# Altium PCB inwall_wifi_psu.PcbDoc
Units mm, origin at the board's own origin, x right, y up, seen from the top; angles counter-clockwise.
Board outline 50 x 50 mm, 2 copper layers (Top Layer, Bottom Layer); 16 components, 15 nets, 48 pads, 0 vias.
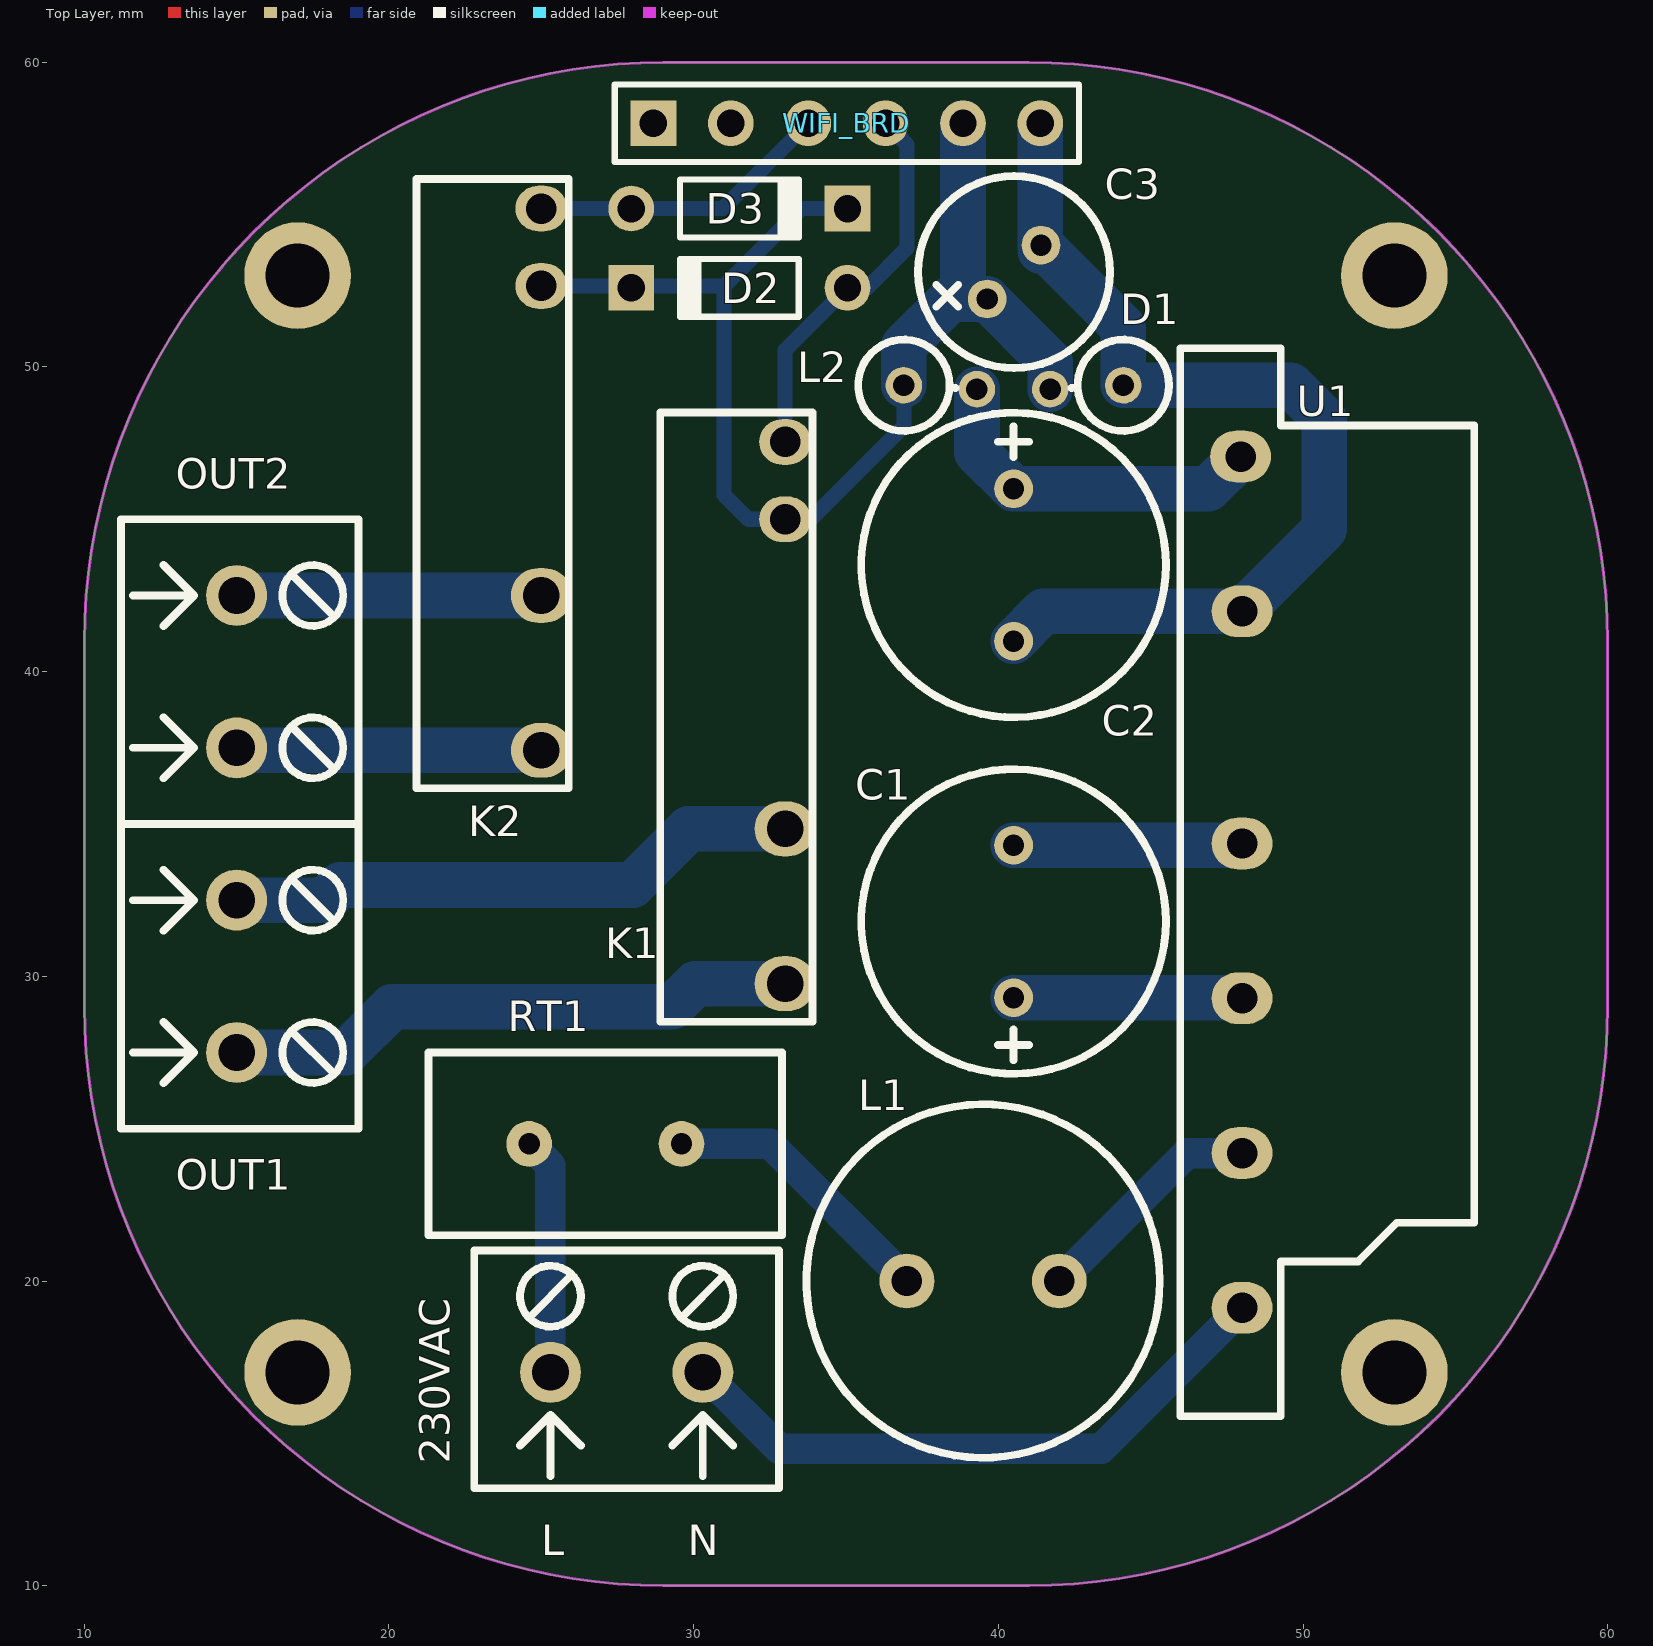
[diagram p0: Top Layer view]
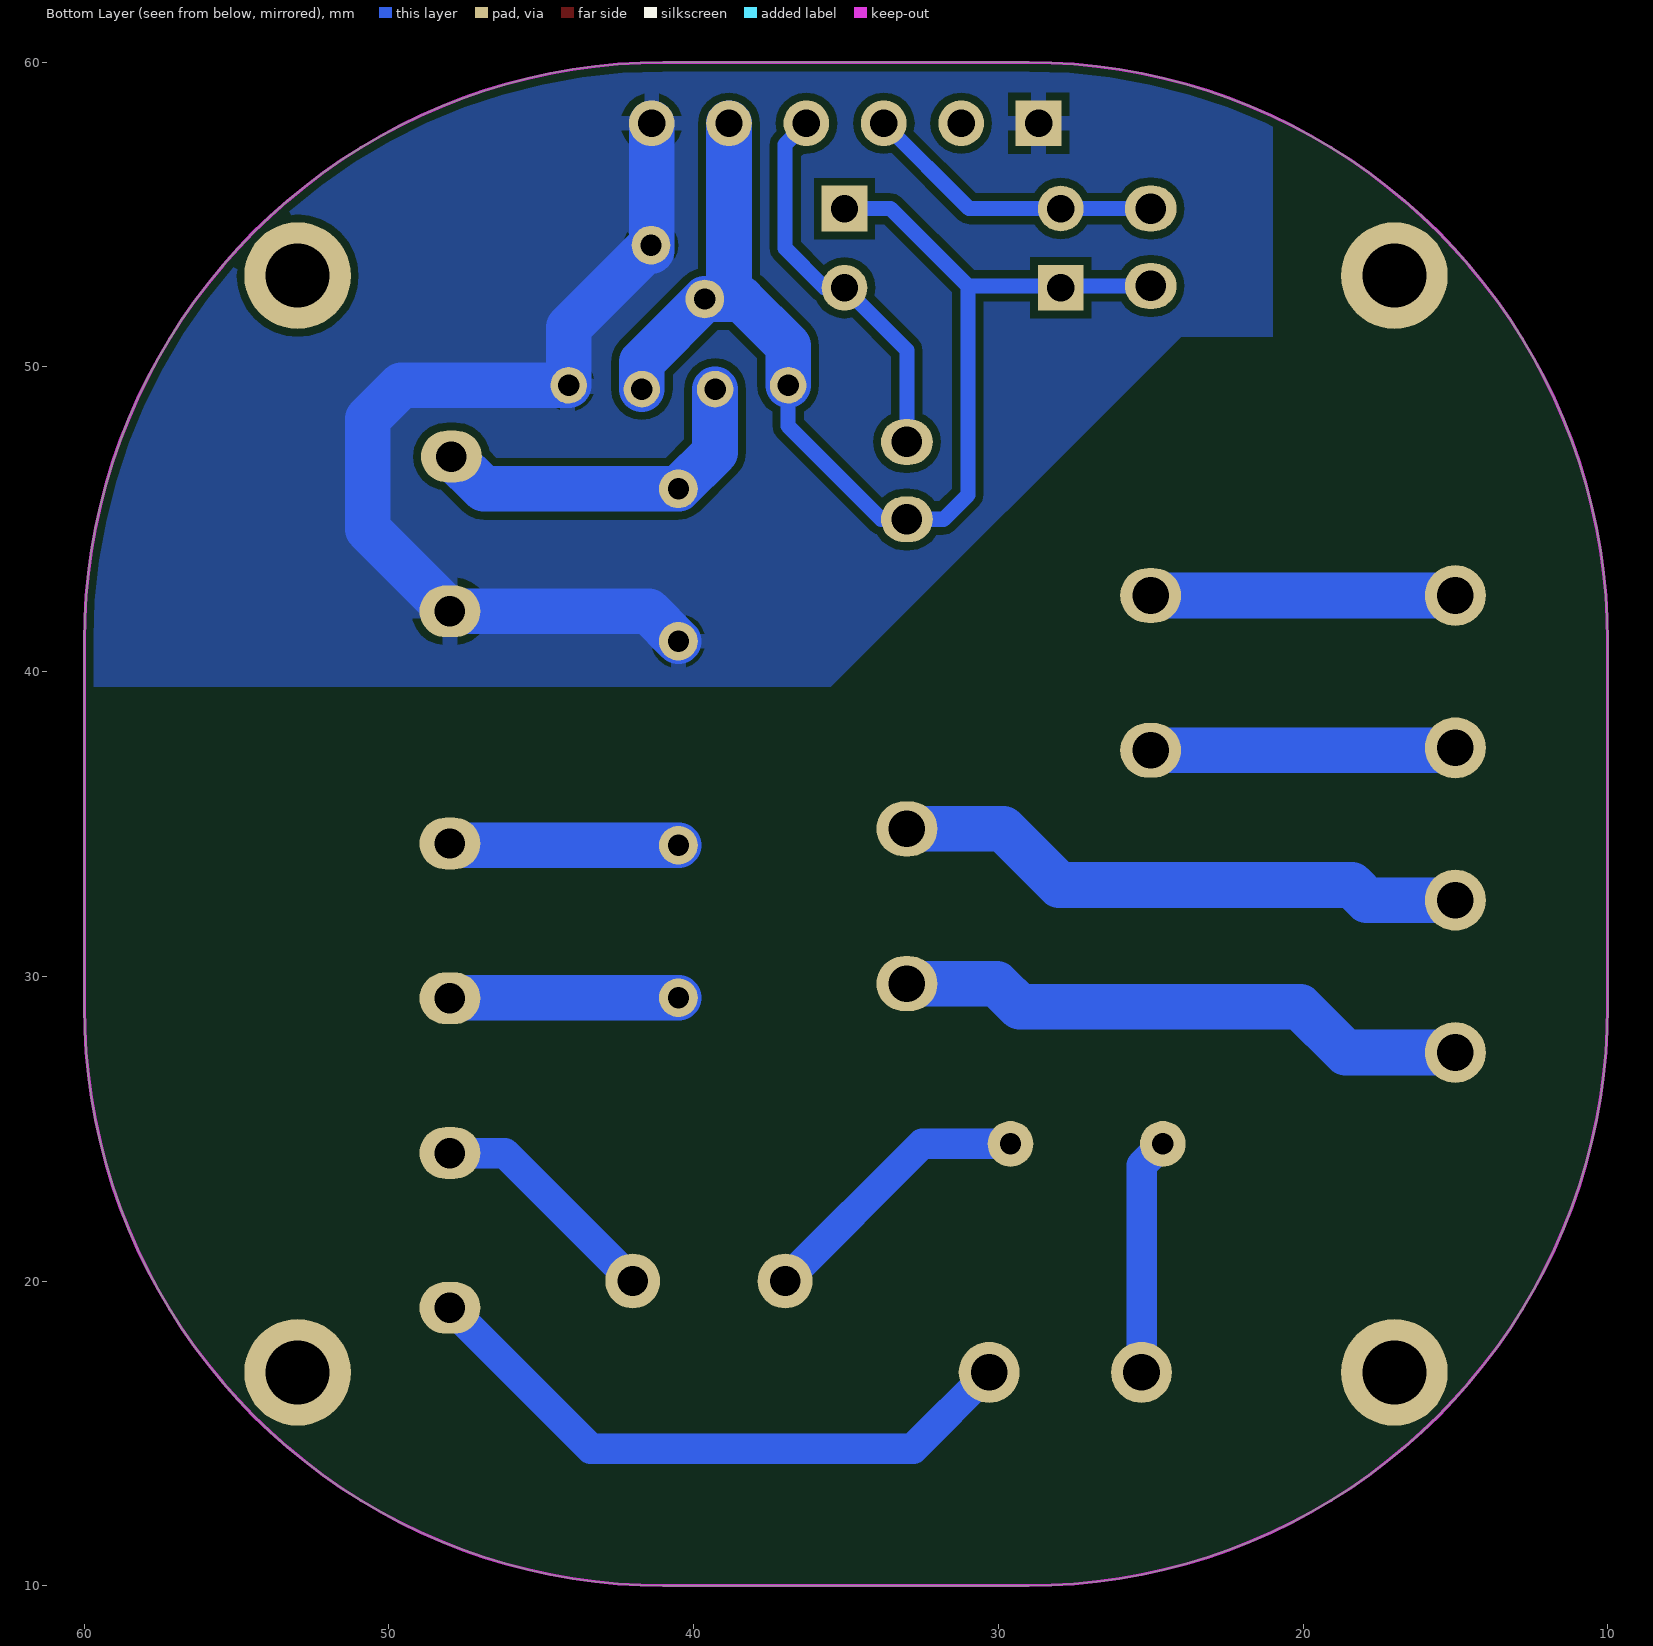
[diagram p1: Bottom Layer view, seen from below]

## Layer stack, top to bottom
Top Solder: solder mask 0.0102, Solder Resist, Dk 3.5
Top Layer: signal copper 0.0356
Dielectric 1: dielectric 0.32, FR-4, Dk 4.8
Bottom Layer: signal copper 0.0356
Bottom Solder: solder mask 0.0102, Solder Resist, Dk 3.5

## Board outline
29,10 cw(c29,29) 10,29 10,41 cw(c29,41) 29,60 41,60 cw(c41,41) 60,41 60,29 cw(c41,29) 41,10

## Design rules (kind name [scope] priority, off if disabled: settings)
Clearance [All] p1: gap=0.25 ignorepadtopadclearanceinfootprint=FALSE except(0: Arc-Hole Track-Hole SMDPad-Hole THPad-Hole Via-Hole Fill-Hole Poly-Hole Region-Hole Text-Hole)
ComponentClearance [All] p1: gap=0.1 collisioncheckmode=3 verticalgap=0.254 showdistances=FALSE
DiffPairsRouting [All] p1: maxlimit=0.5 minlimit=0.125 mostfreqgap=0.25 toplayer_minwidth=0.125 toplayer_maxwidth=1 toplayer_prefwidth=0.25 bottomlayer_minwidth=0.125 bottomlayer_maxwidth=1 bottomlayer_prefwidth=0.25 maxuncoupledlength=12.7
FanoutControl Fanout_BGA [IsBGA] p1: bgadir=Out bgaviamode=Centered fanoutstyle=BGA fanoutdirection=None viagrid=0.025 // Fanout_BGA (Default Rule)
HoleSize [All] p1: absolutevalues=TRUE maxlimit=5 minlimit=0.33 maxpercent=80.000 minpercent=20.000
HoleToHoleClearance [All] p1: gap=0.25 allowstackedmicrovias=TRUE
MatchedLengths [InNetClass('SPIFI')] p1: tolerance=0.2 checknetsindiffpair=TRUE checkdiffpairvsdiffpair=FALSE checkxsignals=FALSE checkothers=FALSE
MinimumAnnularRing [All] p1: minimumring=0.178
MinimumSolderMaskSliver [All] p1: minsoldermaskwidth=0.05
PlaneClearance [All] p1: clearance=0.152
PlaneConnect [All] p1: planeconnectstyle=Direct reliefexpansion=0.508 reliefentries=4 reliefconductorwidth=0.254 reliefairgap=0.254
PolygonConnect [All] p1: thpad.connectstyle=Relief thpad.reliefconductorwidth=0.5 thpad.reliefentries=4 thpad.polygonreliefangle="90 Angle" thpad.airgapwidth=0.25 smdpad.connectstyle=Relief smdpad.reliefconductorwidth=0.5 smdpad.reliefentries=4 smdpad.polygonreliefangle="90 Angle" smdpad.airgapwidth=0.25 via.connectstyle=Direct via.reliefconductorwidth=0.4 via.reliefentries=4 via.polygonreliefangle="90 Angle" via.airgapwidth=0.25
RoomDefinition inwall_wifi_psu [InComponentClass('inwall_wifi_psu')] p1: confinementstyle=ConfineIn formatcopy=TRUE lockcomponents=FALSE outline 9,9 61,9 61,61 9,61
RoutingCorners [All] p1: cornerstyle=45-Degree minsetback=1 maxsetback=1
RoutingVias [All] p1: holewidth=0.35 width=0.7 viastyle="Through Hole" minholewidth=0.33 minwidth=0.686 maxholewidth=0.8 maxwidth=2
SilkToSilkClearance [All] p1: silktosilkclearance=0
SilkToSolderMaskClearance SilkscreenOverComponentPads [IsPad] p1: minsilkscreentomaskgap=0 clearancetoexposedcopper=TRUE
SolderMaskExpansion [All] p1: expansion=0.01
Width [All] p1: maxlimit=5 minlimit=0.152 preferedwidth=0.2
19 further rules are at their usual default settings.

## Components (designator, comment, footprint, x,y, rotation, side; value= is the part's Value field where it differs from the comment)
230VAC "Header 2" DG126-5.0-2P14 25.3,17 r0 top
C1 "UCY2W100MPD" "Capacitor Polarised 10x20x5mm" 40.5,29.3 r90 top value=10uF
C2 "UVZ1E331MPD" "Capacitor Polarised 10x12.5x5mm" 40.5,46 r270 top value=330uF
C3 "UVZ1E101MED" "Capacitor Polarised 6.3x11x2.5mm" 39.632,52.232 r45 top value=100uF
D1 "P6KE8.2A" "Vertically mounted diode 3x6.3mm" 44.1,49.4 r3 top
D2 "Diode 1N4148" DO-35 31.5,52.6 r180 top
D3 "Diode 1N4148" DO-35 31.5,55.2 r0 top
K1 "FRM18A" FRM18A 33,29.76 r90 top
K2 "FRM18A" FRM18A 25,37.42 r90 top
L1 "5900-472-RC" "Inductor 11.5x11.5x5mm" 39.5,20 r0 top value=4.7mH
L2 "DLA2.2-N" "Axial Inductor 3x8mm vertically" 36.9,49.4 r177 top value=2.2uH
OUT1 "Header 2" DG126-5.0-2P14 15,32.5 r270 top
OUT2 "Header 2" DG126-5.0-2P14 15,42.5 r270 top
RT1 "EPCOS B57236S500M" "NTC 11.5x6mm" 27.1,24.5 r180 top
U1 "AMEOF3-JZ" AMEOF3-JZ 48,33.09 r90 top
WIFI_BRD "Header 6" HDR1X6 28.68,58 r0 top

## Footprints (in the part's own frame and the unit in brackets; to place one, negate y for a bottom-side part, rotate by r counter-clockwise, add the part's x,y. Pads: shape width x height; smd on the part's side, far side on the other; paste and mask are expansions set on the pad)
AMEOF3-JZ [mm] "AMEOF3-JZ"
  oval 1.7x2 hole 1: 1(-13.97,0) 3(-8.89,0) 5(-3.81,0) 7(1.27,0) 10(8.89,0) 12(13.97,0.05)
  silkscreen extent -17.53,-7.62 17.53,2.03, body extent -17.53,-7.62 17.53,2.03, height 18.03
"Axial Inductor 3x8mm vertically" [mm] "Axial Inductor 3x8mm vertically"
  round 1.2 hole 0.7: 1(0,0) 2(-2.4,0)
  silkscreen extent -1.7,-1.5 1.5,1.5, body extent -2.7,-1.5 1.5,1.5, height 9.3
"Capacitor Polarised 6.3x11x2.5mm" [mm] "Capacitor Polarised 6.3x11x2.5mm"
  round 1.27 hole 0.7: 1(0,0) 2(2.5,0)
  silkscreen extent -1.9,-3.15 4.4,3.15, body extent -1.9,-3.15 4.4,3.15, height 11.1
"Capacitor Polarised 10x12.5x5mm" [mm] "Capacitor Polarised 10x12.5x5mm"
  round 1.27 hole 0.7: 1(0,0) 2(5,0)
  silkscreen extent -2.5,-5 7.5,5, body extent -2.5,-5 7.5,5, height 12.6
"Capacitor Polarised 10x20x5mm" [mm] "Capacitor Polarised 10x20x5mm"
  round 1.27 hole 0.7: 1(0,0) 2(5,0)
  silkscreen extent -2.5,-5 7.5,5, body extent -2.5,-5 7.5,5, height 20.1
DG126-5.0-2P14 [mm] "DG126-5.0-2P14"
  round 2 hole 1.2: 1(0,0) 2(5,0)
  silkscreen extent -2.5,-3.8 7.5,4, body extent -2.5,-3.8 7.5,4, height 12.5
DO-35 [mm] "Diode, Axial; Body 3.8 x 1.9 mm (LxDia. max), Lead Dia. 0.53 mm (max)"
  round 1.5 hole 0.9: 1(-3.55,0)
  rect 1.5x1.5 hole 0.9: 2(3.55,0)
  silkscreen extent -1.95,-0.95 2.05,0.95
FRM18A [mm] "FRM18A SPST-NO Slim relay"
  oval 1.8x2 hole 1.2: 1(0,0) 2(5.08,0)
  oval 1.5x1.7 hole 1: 3(15.24,0) 4(17.78,0)
  silkscreen extent -1.25,-0.9 18.75,4.1, body extent -1.38,-1.03 18.88,4.23, height 12.5
HDR1X6 [mm] "Connector; Header; 6 Position"
  rect 1.5x1.5 hole 0.9: 1(0,0)
  round 1.5 hole 0.9: 2(2.54,0) 3(5.08,0) 4(7.62,0) 5(10.16,0) 6(12.7,0)
  silkscreen extent -1.27,-1.27 13.97,1.27
"Inductor 11.5x11.5x5mm" [mm] "Inductor 11.5x11.5x5mm"
  round 1.8 hole 1: 1(-2.5,0) 2(2.5,0)
  silkscreen extent -5.8,-5.8 5.8,5.8, body extent -5.8,-5.8 5.8,5.8, height 11.5
"NTC 11.5x6mm" [mm] "NTC Protection thermisotr"
  round 1.5 hole 0.7: 1(-2.5,0) 2(2.5,0)
  silkscreen extent -5.8,-3 5.8,3, body extent -5.8,-3 5.8,3, height 16
"Vertically mounted diode 3x6.3mm" [mm] "Vertically mounted diode 3x6.3mm"
  round 1.2 hole 0.7: 1(0,0) 2(-2.4,0)
  silkscreen extent -1.7,-1.5 1.5,1.5, body extent -2.7,-1.5 1.5,1.5, height 8.3

## Part data
230VAC OUT1 OUT2: "Header, 2-Pin", LatestRevisionDate=17-Jul-2002, LatestRevisionNote="Re-released for DXP Platform.", Publisher="Altium Limited"
C1: library part "Cap Pol1", "Polarized Capacitor (Radial)", Voltage=450V, LatestRevisionDate=17-Jul-2002, LatestRevisionNote="Re-released for DXP Platform.", PackageDescription="Polarized Capacitor (Radial); 2 Leads", PackageReference=RB7.6-15, Published=8-Jun-2000, Publisher="Altium Limited", Supplier 1=TME, Supplier Part Number 1=UCY2W100MPD
C2 C3: library part "Cap Pol1", "Polarized Capacitor (Radial)", Voltage=25V, LatestRevisionDate=17-Jul-2002, LatestRevisionNote="Re-released for DXP Platform.", PackageDescription="Polarized Capacitor (Radial); 2 Leads", PackageReference=RB7.6-15, Published=8-Jun-2000, Publisher="Altium Limited", Supplier 1=TME
  C2: Supplier Part Number 1=UVZ1E331MPD
  C3: Supplier Part Number 1=UVZ1E101MED
D1: library part Tranzorb, "Transient Voltage Suppression (TVS) Diode", Supplier Part Number 1=P6KE8.2A-DIO, LatestRevisionDate=17-Jul-2002, LatestRevisionNote="Re-released for DXP Platform.", PackageDescription="Axial Lead Diode", PackageReference=DO-7, Published=24-Mar-1999, Publisher="Altium Limited", Supplier 1=TME
D2 D3: "High Conductance Fast Diode", Code_JEDEC=DO-204-AH, ComponentLink1Description="Manufacturer Link", ComponentLink1URL=http://www.fairchildsemi.com/, ComponentLink2Description=Datasheet, ComponentLink2URL=http://www.fairchildsemi.com/ds/1N%2F1N4148.pdf, DatasheetVersion=1997, LatestRevisionDate=17-Jul-2002, LatestRevisionNote="Re-released for DXP Platform.", PackageDescription="Diode, Axial; Body 3.8 x 1.9 mm (LxDia. max), Lead Dia. 0.53 mm (max)", PackageReference=DO-35, Published=8-Jun-2000, Publisher="Altium Limited"
K1 K2: library part Relay-SPST, "Single-Pole Single-Throw Relay", Supplier Part Number 1=FRM18A-5VDC, LatestRevisionDate=17-Jul-2002, LatestRevisionNote="Re-released for DXP Platform.", PackageReference=MODULE4, Published=24-Mar-1999, Publisher="Altium Limited", Supplier 1=TME
L1 L2: library part "Inductor Iron", "Magnetic-Core Inductor", LatestRevisionDate=17-Jul-2002, LatestRevisionNote="Re-released for DXP Platform.", PackageDescription="Axial Device, Thru-Hole; 2 Leads; 0.9 in Pin Spacing", PackageReference=AXIAL-0.9, Published=24-Mar-1999, Publisher="Altium Limited", Supplier 1=TME
  L1: Supplier Part Number 1=5900-472-RC
  L2: Supplier Part Number 1=DLA2.2-N
RT1: library part "Res Thermal", "Thermistor", Supplier Part Number 1=B57236S500M, Code_IPC=RESC2012, LatestRevisionDate=29-May-2009, LatestRevisionNote="IPC-7351 Footprint Added.", PackageDescription="Chip Resistor 0805 Case Size", PackageReference=6-0805, PackageVersion=Mar-2003, Published=24-Mar-1999, Publisher="Altium Limited", Supplier 1=TME
U1: "230AC / 3W DC switching PSU", Supplier Part Number 1=AMEOF3-5SJZ, Supplier 1=TME
WIFI_BRD: "Header, 6-Pin", LatestRevisionDate=17-Jul-2002, LatestRevisionNote="Re-released for DXP Platform.", Publisher="Altium Limited"

## Free pads (board coordinates)
  round 3.5 hole 2.1 unplated: MH(17,17) MH(17,53) MH(53,17) MH(53,53)

## Nets (pads, with @x,y where several pads share a name; then routed paths per layer and width w, separated by ;. In a path a pad name is that pad's centre, name@x,y a point inside that pad or via, vN(x,y) a via of type N, cw(c..) or ccw(c..) an arc to the next point about the centre after c; other vN are vias at no path point)
GND: C2.2 C3.2 D1.1 U1.10 WIFI_BRD.1 WIFI_BRD.6 | length 32.2
  Bottom Layer w0.2: C3.2@41.38,53.82 C3.2@41.4,53.8
  Bottom Layer w1.5: C2.2 41.48,41.98 U1.10 50.7,44.68 50.7,48.3 49.6,49.4 D1.1 44.1,51.3 41.6,53.8 C3.2@41.4,53.8 ; C3.2@41.38,53.82 WIFI_BRD.6
Net230VAC_1: 230VAC.1 RT1.2 | length 7.8
  Bottom Layer w1: RT1.2 25.3,23.8 230VAC.1
Net230VAC_2: 230VAC.2 U1.1 | length 20.6
  Bottom Layer w1: 230VAC.2 32.8,14.5 43.38,14.5 U1.1
NetC1_1: C1.1 U1.5 | length 7.5
  Bottom Layer w0.2: U1.5@47.98,29.3 U1.5
  Bottom Layer w1.5: C1.1 U1.5@47.98,29.3
NetC1_2: C1.2 U1.7 | length 7.5
  Bottom Layer w0.2: U1.7@47.94,34.3 U1.7
  Bottom Layer w1.5: C1.2 U1.7@47.94,34.3
NetC2_1: C2.1 L2.2 U1.12 | length 11.7
  Bottom Layer w1.5: L2.2 39.297,47.203 C2.1 46.89,46 U1.12
NetK1_1: K1.1 OUT1.2 | length 18.9
  Bottom Layer w1.5: OUT1.2 18.6,27.5 20.1,29 29.3,29 30.06,29.76 K1.1
NetK1_2: K1.2 OUT1.1 | length 19
  Bottom Layer w1.5: OUT1.1 17.9,32.5 18.4,33 28,33 29.84,34.84 K1.2
NetK2_1: K2.1 OUT2.2 | length 10
  Bottom Layer w0.2: OUT2.2 OUT2.2@15.08,37.42
  Bottom Layer w1.5: OUT2.2@15.08,37.42 K2.1
NetK2_2: K2.2 OUT2.1 | length 10
  Bottom Layer w1.5: OUT2.1 K2.2
NetL1_1: L1.1 RT1.1 | length 8.8
  Bottom Layer w1: RT1.1@30.1,24.5 32.5,24.5 L1.1
NetL1_2: L1.2 U1.3 | length 7.7
  Bottom Layer w1: L1.2 46.2,24.2 U1.3
OC1: D2.1 K1.4 WIFI_BRD.4 | length 12.8
  Bottom Layer w0.5: K1.4 33,50.55 D2.1 35.7,52.6 37,53.9 37,57.3 WIFI_BRD.4
OC2: D3.1 K2.4 WIFI_BRD.3 | length 9.9
  Bottom Layer w0.5: K2.4 D3.1 30.96,55.2 WIFI_BRD.3
VCC_5.0V: C3.1 D1.2 D2.2 D3.2 K1.3 K2.3 L2.1 WIFI_BRD.5 | length 41.6
  Bottom Layer w0.2: 38.84,52.824 39.432,52.232 C3.1@39.632,52.032
  Bottom Layer w0.5: K2.3 31,52.66 ; D3.2 33.54,55.2 31,52.66 ; L2.1 36.9,48.06 33.84,45 31.8,45 31,45.8 31,52.66
  Bottom Layer w1.5: L2.1 36.9,50.7 38.432,52.232 39.432,52.232 C3.1 41.703,50.161 D1.2 ; 38.84,52.824 WIFI_BRD.5
pads on no net: WIFI_BRD.2

## Polygon pours and split planes (outlines as drawn)
GND on Bottom Layer "gndplane" (solid, remove dead copper, pour order 12): 21,60 60,60 60,39.5 35.5,39.5 24,51 21,51

## Keep-outs
Keep-Out Layer:
  the board outline again, w0.1

## Silkscreen, mask and mechanical layers (free items; w line width, h text height)
Top Overlay:
  text "L" at 25,11 h1
  text "N" at 29.8,11 h1